# EAGLE board PCB board (EAGLE 9.5.1)
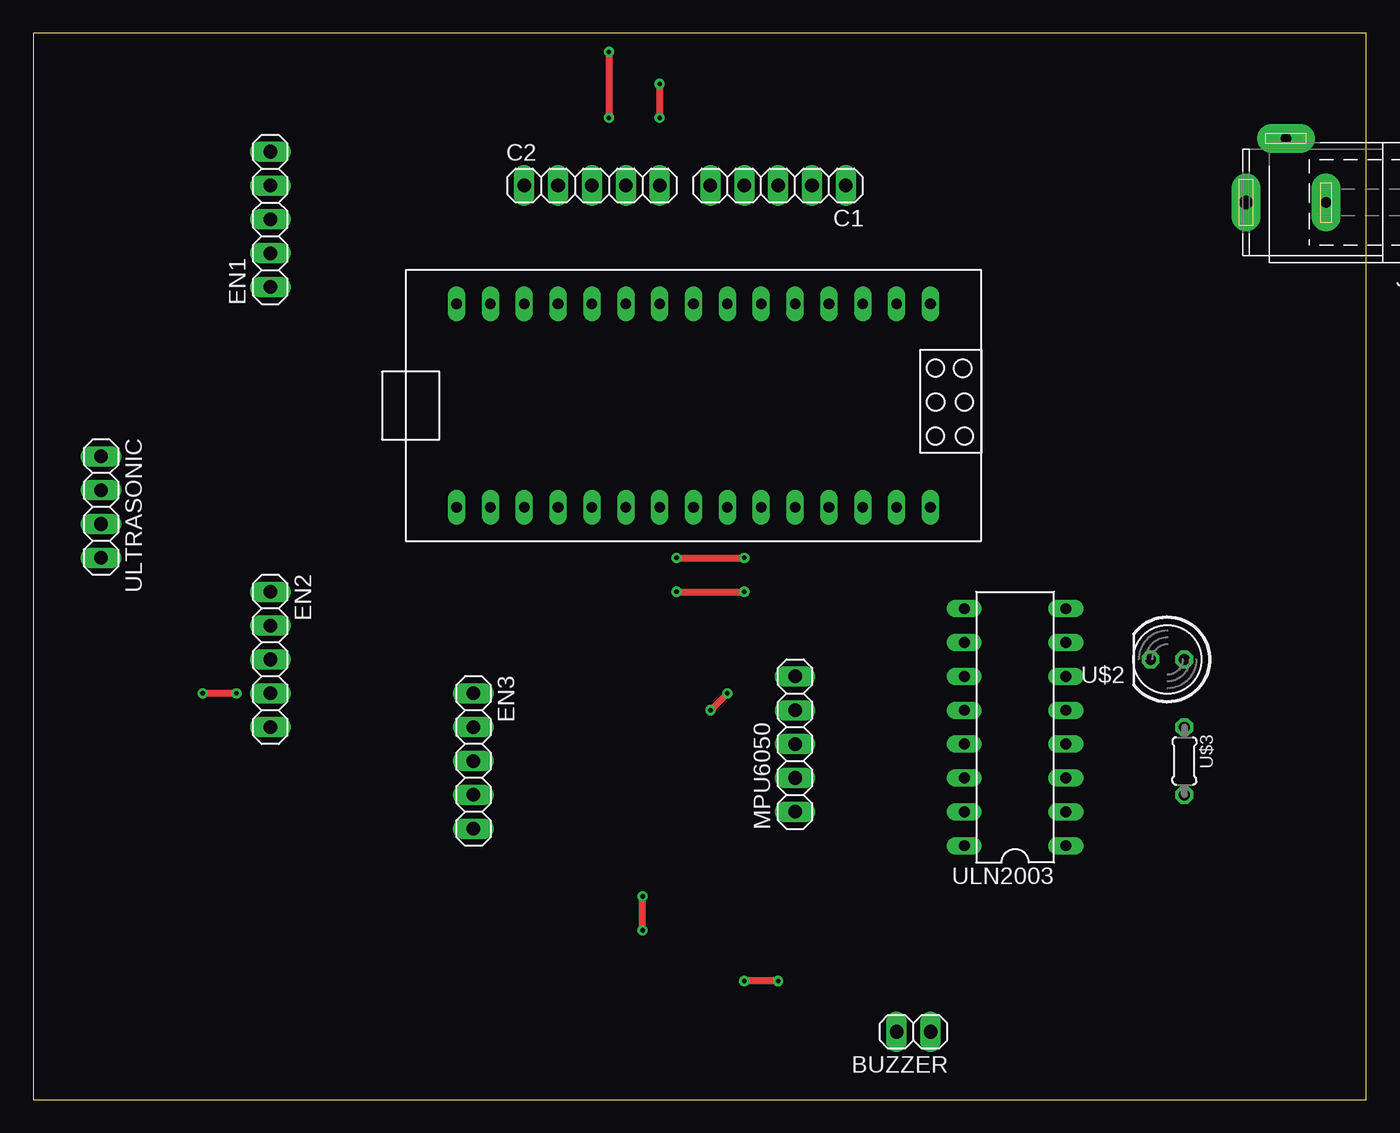
[diagram p0: board, top side]
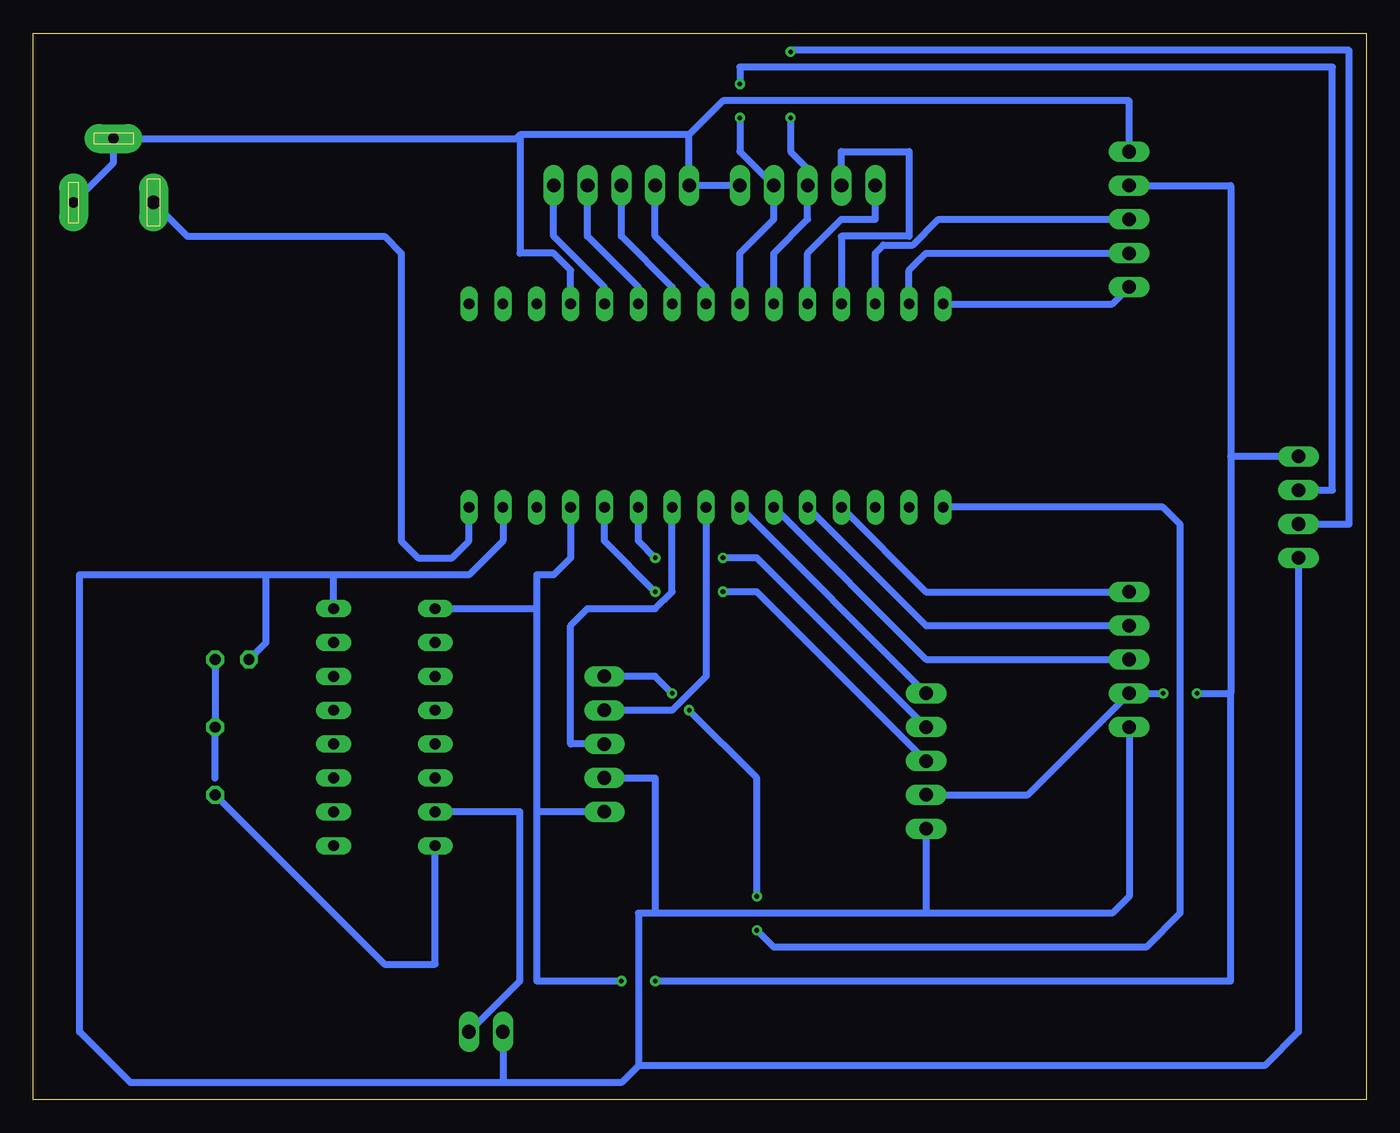
[diagram p1: board, bottom side, seen from below]

Size 100 x 80 mm. Coordinates in mm from the lower left corner, seen from the top.
Outline: 0,0 100,0 100,80 0,80 0,0
Copper layers (1*16): Top 0.035mm / dielectric 1.5mm / Bottom 0.035mm
Design rules "default": minimum track width 6mil, minimum drill 0.35mm, track to track 6mil, track to pad 6mil, pad to pad 6mil, via to via 6mil, smd to smd 6mil, copper to edge 40mil, drill to drill 6mil, minimum pad ring 10mil, minimum via ring 8mil, stop-mask expansion 4mil, vias tented up to drill 0mil, thermal gap 10mil

## Footprints (pad centres in the part's own frame; a part is rotated, then mirrored left to right if it is on the bottom)
1X02 = drill 1.016 long: 1 -1.27,0; 2 1.27,0
1X05 = drill 1.016 long: 1 -5.08,0; 2 -2.54,0; 3 0,0; 4 2.54,0; 5 5.08,0
SPC4077 = drill 0.8 pad 2.184 long: 1 -3,0; 2 0,-4.8 | drill 1 pad 2.184 long: 3 3,0
NANO = drill 0.8 long: 3.3V -10.16,24.13; 5V -10.16,-1.27; A0 -10.16,19.05; A1 -10.16,16.51; A2 -10.16,13.97; A3 -10.16,11.43; A4 -10.16,8.89; A5 -10.16,6.35; A6 -10.16,3.81; A7 -10.16,1.27; AREF -10.16,21.59; D2 5.08,1.27; D3 5.08,3.81; D4 5.08,6.35; D5 5.08,8.89; D6 5.08,11.43; D7 5.08,13.97; D8 5.08,16.51; D9 5.08,19.05; D10 5.08,21.59; D11 5.08,24.13; D12 5.08,26.67; D13 -10.16,26.67; GND -10.16,-6.35; GND1 5.08,-1.27; RAW -10.16,-8.89; RST -10.16,-3.81; RST1 5.08,-3.81; RX1 5.08,-6.35; TX0 5.08,-8.89
LED5MM = drill 0.813 octagon: A -1.27,0; K 1.27,0
0204/5 = drill 0.813 octagon: 1 -2.54,0; 2 2.54,0
DIL16 = drill 0.813 long: 1 -8.89,-3.81; 2 -6.35,-3.81; 3 -3.81,-3.81; 4 -1.27,-3.81; 5 1.27,-3.81; 6 3.81,-3.81; 7 6.35,-3.81; 8 8.89,-3.81; 9 8.89,3.81; 10 6.35,3.81; 11 3.81,3.81; 12 1.27,3.81; 13 -1.27,3.81; 14 -3.81,3.81; 15 -6.35,3.81; 16 -8.89,3.81
1X04 = drill 1.016 long: 1 -3.81,0; 2 -1.27,0; 3 1.27,0; 4 3.81,0

## Placement (x,y rotation side)
BUZZER  [1X02]  66.04,5.08 180 top
C1  [1X05]  55.88,68.58 180 top
C2  [1X05]  41.91,68.58 0 top
EN1  [1X05]  17.78,66.04 90 top
EN2  [1X05]  17.78,33.02 270 top
EN3  [1X05]  33.02,25.4 270 top
J1  [SPC4077]  93.98,67.31 180 top
MPU6050  [1X05]  57.15,26.67 90 top
U$1  ARDUINO_NANO  [NANO]  58.42,54.61 90 top
U$2  LED5MM  [LED5MM]  85.09,33.02 180 top
U$3  RES-220  [0204/5]  86.36,25.4 270 top
ULN2003  ULN2003AN  [DIL16]  73.66,27.94 90 top
ULTRASONIC  [1X04]  5.08,44.45 270 top

## Library data of the parts
BUZZER C1 C2 EN1-EN3 MPU6050 U$1-U$3 ULN2003 ULTRASONIC = MIA-Training
J1 = con-jack; OC_FARNELL: unknown; OC_NEWARK: unknown

## Nets
3.3V: U$1.3.3V
5.5V: EN1.4 EN2.4 EN3.4 MPU6050.1 U$1.5V ULN2003.9 ULTRASONIC.1
A0: EN2.1 U$1.A0
A1: EN2.2 U$1.A1
A2: EN2.3 U$1.A2
A3: EN3.1 U$1.A3
A4: MPU6050.4 U$1.A4
A5: MPU6050.3 U$1.A5
A6: EN3.2 U$1.A6
A7: EN3.3 U$1.A7
AREF: U$1.AREF
D2: C1.1 U$1.D2
D3: C1.2 U$1.D3
D4: C1.3 U$1.D4
D5: C1.4 U$1.D5
D6: C2.4 U$1.D6 ULTRASONIC.2
D7: C2.3 U$1.D7 ULTRASONIC.3
D8: C2.1 U$1.D8
D9: C2.2 U$1.D9
D10: EN1.3 U$1.D10
D11: EN1.2 U$1.D11
D12: EN1.1 U$1.D12
D13: MPU6050.5 U$1.D13
GND: BUZZER.2 EN2.5 EN3.5 MPU6050.2 U$1.GND U$2.K ULN2003.8 ULTRASONIC.4
GND2: C1.5 C2.5 EN1.5 J1.1 J1.2 U$1.GND1
I1: ULN2003.1
I2: ULN2003.2
I3: ULN2003.3
I4: ULN2003.4
I5: ULN2003.5
I6: ULN2003.6
I7: ULN2003.7
N$1: U$2.A U$3.1
O1: U$3.2 ULN2003.16
O2: BUZZER.1 ULN2003.15
O3: ULN2003.14
O4: ULN2003.13
O5: ULN2003.12
O6: ULN2003.11
O7: ULN2003.10
RAW: J1.3 U$1.RAW
RST: U$1.RST
RST1: U$1.RST1
RX1: U$1.RX1
TX0: U$1.TX0

## Tracks (layer width: path | path; a pad name or v marks a point on that pad's centre or on a via)
5.5V  (via drill 0.35)
  Top 0.508: v15.24,30.48 v12.7,30.48 | v55.88,8.89 v53.34,8.89
  Bottom 0.508: EN1.4 10.16,68.58 10.16,48.26 | 10.16,48.26 10.16,30.48 | 10.16,30.48 10.16,8.89 v53.34,8.89 | v15.24,30.48 EN2.4 25.4,22.86 EN3.4 | v12.7,30.48 10.16,30.48 | U$1.5V 59.69,40.64 60.96,39.37 62.23,39.37 62.23,36.83 | 62.23,36.83 62.23,21.59 | 62.23,21.59 62.23,8.89 v55.88,8.89 | ULN2003.9 62.23,36.83 | MPU6050.1 62.23,21.59 | ULTRASONIC.1 10.16,48.26
A0
  Bottom 0.508: U$1.A0 33.02,38.1 EN2.1
A1
  Bottom 0.508: U$1.A1 33.02,35.56 EN2.2
A2
  Bottom 0.508: U$1.A2 33.02,33.02 EN2.3
A3
  Bottom 0.508: EN3.1 U$1.A3
A4
  Bottom 0.508: U$1.A4 49.53,31.75 52.07,29.21 MPU6050.4
A5
  Bottom 0.508: MPU6050.3 59.69,26.67 59.69,35.56 58.42,36.83 53.34,36.83 52.07,38.1 U$1.A5
A6  (via drill 0.35)
  Top 0.508: v48.26,40.64 v53.34,40.64
  Bottom 0.508: EN3.2 45.72,40.64 v48.26,40.64 | v53.34,40.64 54.61,41.91 U$1.A6
A7  (via drill 0.35)
  Top 0.508: v48.26,38.1 v53.34,38.1
  Bottom 0.508: EN3.3 45.72,38.1 v48.26,38.1 | v53.34,38.1 57.15,41.91 U$1.A7
D2
  Bottom 0.508: U$1.D2 57.15,60.96 60.96,64.77 C1.1
D3
  Bottom 0.508: U$1.D3 54.61,60.96 58.42,64.77 C1.2
D4
  Bottom 0.508: U$1.D4 52.07,60.96 55.88,64.77 C1.3
D5
  Bottom 0.508: U$1.D5 49.53,60.96 53.34,64.77 C1.4
D6  (via drill 0.35)
  Top 0.508: v46.99,76.2 v46.99,73.66
  Bottom 0.508: U$1.D6 46.99,63.5 44.45,66.04 C2.4 46.99,71.12 v46.99,73.66 | ULTRASONIC.2 2.54,45.72 2.54,77.47 46.99,77.47 v46.99,76.2
D7  (via drill 0.35)
  Top 0.508: v43.18,78.61 v43.18,73.66
  Bottom 0.508: U$1.D7 44.45,63.5 41.91,66.04 C2.3 41.91,69.85 43.18,71.12 v43.18,73.66 | ULTRASONIC.3 1.27,43.18 1.27,78.73 43.18,78.73 v43.18,78.61
D8
  Bottom 0.508: U$1.D8 41.91,63.5 39.37,66.04 36.83,66.04 C2.1
D9
  Bottom 0.508: C2.2 39.37,71.12 34.29,71.12 34.29,64.77 39.37,64.77 U$1.D9
D10
  Bottom 0.508: U$1.D10 36.83,63.5 36.22,64.11 34.02,64.11 32.09,66.04 EN1.3
D11
  Bottom 0.508: U$1.D11 34.29,62.23 33.02,63.5 EN1.2
D12
  Bottom 0.508: U$1.D12 19.05,59.69 EN1.1
D13  (via drill 0.35)
  Top 0.508: v45.72,12.7 v45.72,15.24 | v50.8,29.21 v52.07,30.48
  Bottom 0.508: U$1.D13 15.24,44.45 13.97,43.18 13.97,13.97 16.51,11.43 44.45,11.43 v45.72,12.7 | v45.72,15.24 45.72,24.13 v50.8,29.21 | v52.07,30.48 53.34,31.75 MPU6050.5
GND
  Bottom 0.508: MPU6050.2 53.34,24.13 53.34,13.97 | U$1.GND 64.77,41.91 67.31,39.37 77.47,39.37 | 77.47,39.37 82.55,39.37 | 82.55,39.37 96.52,39.37 96.52,5.08 92.71,1.27 64.77,1.27 | ULN2003.8 77.47,39.37 | EN2.5 17.78,15.24 19.05,13.97 33.02,13.97 | 33.02,13.97 53.34,13.97 | 53.34,13.97 54.61,13.97 54.61,2.54 | 54.61,2.54 55.88,1.27 64.77,1.27 | EN3.5 33.02,13.97 | BUZZER.2 64.77,1.27 | U$2.K 82.55,34.29 82.55,39.37 | ULTRASONIC.4 5.08,5.08 7.62,2.54 54.61,2.54
GND2
  Bottom 0.508: 50.8,72.39 C1.5 C2.5 | 50.8,72.39 63.5,72.39 | 63.5,72.39 63.5,63.5 60.96,63.5 59.69,62.23 U$1.GND1 | EN1.5 17.78,74.93 48.26,74.93 50.8,72.39 | 63.5,72.39 63.78,72.11 J1.2 93.98,70.31 J1.1
N$1
  Bottom 0.508: U$2.A U$3.1 86.36,24.13
O1
  Bottom 0.508: U$3.2 73.66,10.16 69.85,10.16 ULN2003.16
O2
  Bottom 0.508: BUZZER.1 63.5,8.89 63.5,21.59 ULN2003.15
RAW
  Bottom 0.508: J1.3 88.44,64.77 73.66,64.77 72.39,63.5 72.39,41.91 71.12,40.64 68.58,40.64 67.31,41.91 U$1.RAW